# Altium PCB PCB3.PcbDoc
Units mil, origin at the board's own origin, x right, y up, seen from the top; angles counter-clockwise.
Board outline 6000 x 4000 mil, 2 copper layers (Top Layer, Bottom Layer); 23 components, 20 nets, 68 pads, 0 vias.
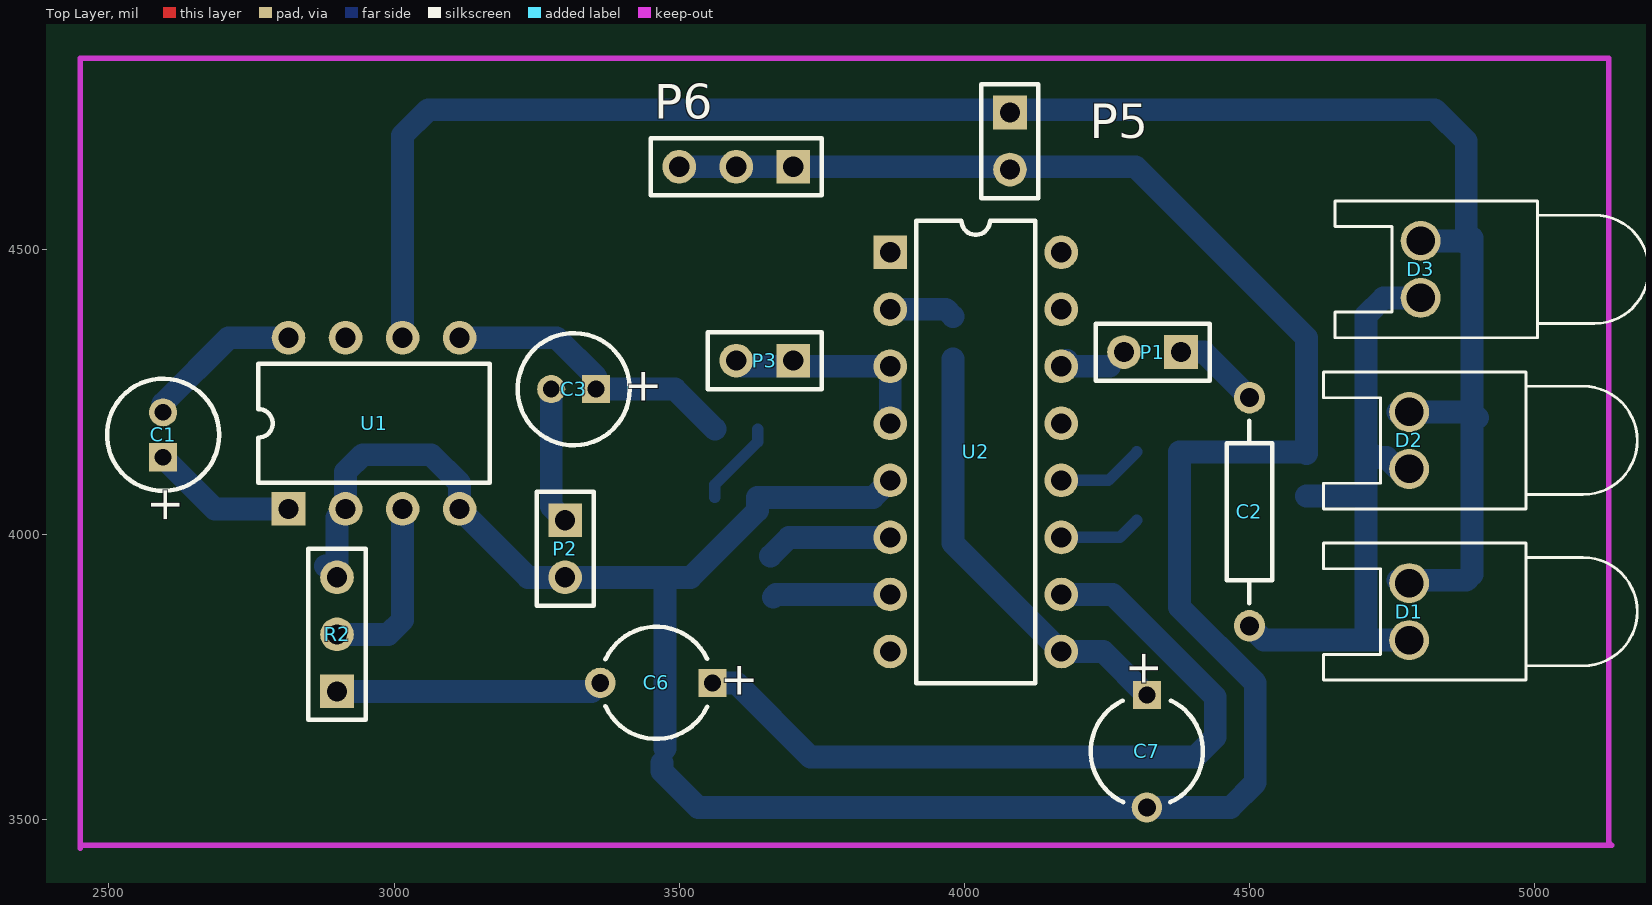
[diagram p0: Top Layer view]
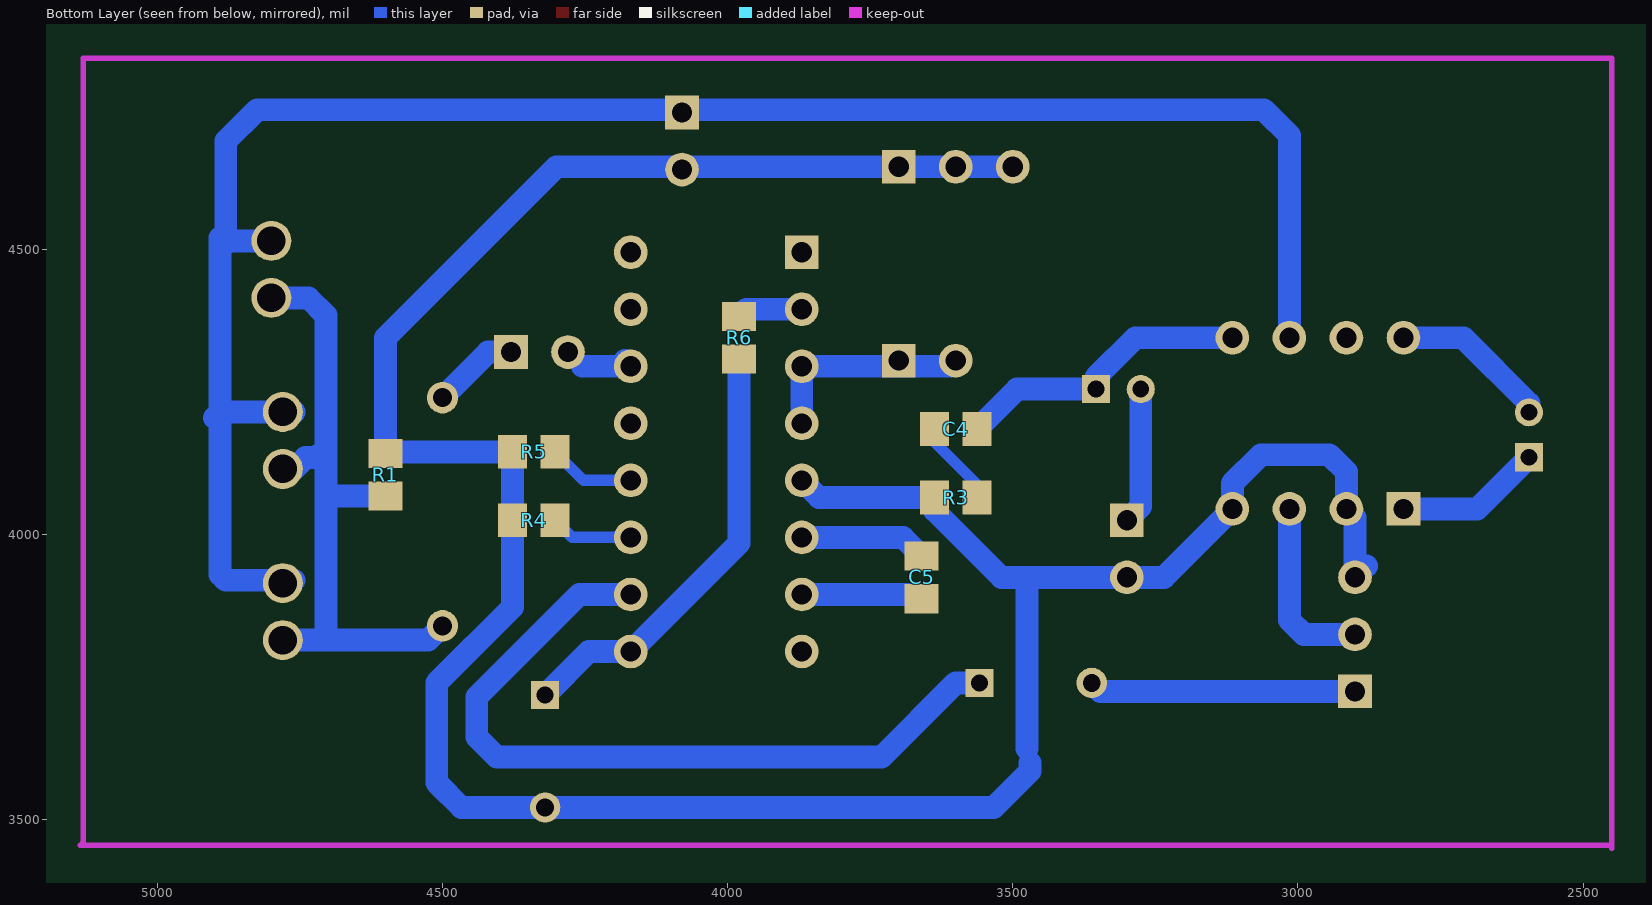
[diagram p1: Bottom Layer view, seen from below]

## Layer stack, top to bottom
Top Layer: signal copper 1.4
Dielectric: dielectric 12.6, FR-4, Dk 4.8
Bottom Layer: signal copper 1.4

## Board outline
1000,1000 7000,1000 7000,5000 1000,5000

## Design rules (kind name [scope] priority, off if disabled: settings)
Clearance [All] p1: gap=10
ComponentClearance [All] p1: gap=10 collisioncheckmode=3 verticalgap=10
PolygonConnect [All] p1: connectstyle=Relief reliefconductorwidth=10 reliefentries=4 polygonreliefangle="90 Angle"
RoutingVias [All] p1: holewidth=28 width=50 viastyle="Through Hole" minholewidth=28 minwidth=50 maxholewidth=28 maxwidth=50
SolderMaskExpansion [All] p1: expansion=4
TestPointUsage [All] p1: valid=0 allowmultiple=FALSE
Testpoint [All] p1: side=15 testpointundercomponent=TRUE minsize=40 maxsize=100 preferedsize=60 minholesize=0 maxholesize=40 preferedholesize=32 testpointgrid=1 style=1023 order=0-112345678
Width [All] p1: maxlimit=50 minlimit=10 preferedwidth=10 toplayer_maxwidth=10 minimp=50.000000 maximp=50.000000 favimp=50.000000
18 further rules are at their usual default settings.

## Components (designator, comment, footprint, x,y, rotation, side; value= is the part's Value field where it differs from the comment)
C1 "Cap Pol1" B 2595,4175 r90 top
C2 "Cap" AXIAL-0.4 4500,4040 r90 top
C3 "Cap Pol1" B 3315,4255 r180 top
C4 "Cap" 6-0805 3600,4185 r180 bottom
C5 "Cap" 6-0805 3660,3925 r90 bottom
C6 "Cap" CAPPR5-5x5 3460,3740 r180 top
C7 "Cap" CAPPR5-5x5 4320,3620 r270 top
D1 "LED0" LED-0 4780,3865 r90 top
D2 "LED0" LED-0 4780,4165 r90 top
D3 "LED0" LED-0 4800,4465 r90 top
P1 "Header 2" HDR1X2 4380,4320 r180 top
P2 "Header 2" HDR1X2 3300,4025 r270 top
P3 "Header 2" HDR1X2 3700,4305 r180 top
P5 "Header 2" HDR1X2 4080,4740 r270 top
P6 "Header 3" HDR1X3 3700,4645 r180 top
R1 "Res2" 6-0805 4600,4105 r90 bottom
R2 "" HDR1X3 2900,3725 r90 top
R3 "Res2" 6-0805 3600,4065 r0 bottom
R4 "Res2" 6-0805 4340,4025 r0 bottom
R5 "Res2" 6-0805 4340,4145 r0 bottom
R6 "Res2" 6-0805 3980,4345 r270 bottom
U1 "LM386" DIP-8 2965,4195 r0 top
U2 "CD4046" DIP-16 4020,4145 r270 top

## Footprints (in the part's own frame and the unit in brackets; to place one, negate y for a bottom-side part, rotate by r counter-clockwise, add the part's x,y. Pads: shape width x height; smd on the part's side, far side on the other; paste and mask are expansions set on the pad)
6-0805 [mm] "Chip Resistor; Body 2.0 x 1.3 mm (LxW typ)"
  rect 1.3x1.5 smd: 1(-0.95,0) 2(0.95,0)
AXIAL-0.4 [mm] "Resistor; 2 Leads"
  round 1.4 hole 0.85: 1(-5.08,0) 2(5.08,0)
  silkscreen extent -4.06,-1.02 4.06,1.02
B [mm] "Capacitor, Electrolytic, Radial; Body 5 x 6.8 mm (Dia.xH typ); Pin Spacing 2 mm (typ)"
  rect 1.25x1.25 hole 0.75: 1(-1,0)
  round 1.25 hole 0.75: 2(1,0)
  silkscreen extent -2.5,-2.5 2.5,2.5
CAPPR5-5x5 [mm] "Capacitor, Electrolytic, Radial; Body 5 x 5 mm (Dia.xH typ); Pin Spacing 5 mm (typ)"
  rect 1.25x1.25 hole 0.75: 1(-2.5,0)
  round 1.35 hole 0.8: 2(2.5,0)
  silkscreen extent -2.26,-2.5 2.27,2.5
DIP-8 [mm] "DIP; 8 Leads; Row Spacing 7.62 mm; Pitch 2.54 mm"
  rect 1.5x1.5 hole 0.9: 1(-3.81,-3.81)
  round 1.5 hole 0.9: 2(-1.27,-3.81) 3(1.27,-3.81) 4(3.81,-3.81) 5(3.81,3.81) 6(1.27,3.81) 7(-1.27,3.81) 8(-3.81,3.81)
  silkscreen extent -5.15,-2.65 5.15,2.65
DIP-16 [mm] "DIP; 16 Leads; Row Spacing 7.62 mm; Pitch 2.54 mm"
  rect 1.5x1.5 hole 0.9: 1(-8.89,-3.81)
  round 1.5 hole 0.9: 2(-6.35,-3.81) 3(-3.81,-3.81) 4(-1.27,-3.81) 5(1.27,-3.81) 6(3.81,-3.81) 7(6.35,-3.81) 8(8.89,-3.81) 9(8.89,3.81) 10(6.35,3.81) 11(3.81,3.81) 12(1.27,3.81) 13(-1.27,3.81) 14(-3.81,3.81) 15(-6.35,3.81) 16(-8.89,3.81)
  silkscreen extent -10.3,-2.65 10.3,2.65
HDR1X2 [mm] "Connector; Header; 2 Position"
  rect 1.5x1.5 hole 0.9: 1(0,0)
  round 1.5 hole 0.9: 2(2.54,0)
  silkscreen extent -1.27,-1.27 3.81,1.27
HDR1X3 [mm] "Connector; Header; 3 Position"
  rect 1.5x1.5 hole 0.9: 1(0,0)
  round 1.5 hole 0.9: 2(2.54,0) 3(5.08,0)
  silkscreen extent -1.27,-1.27 6.35,1.27
LED-0 [mil] "Typical INFRARED GaAs LED; 2 Leads"
  round 70 hole 50: 1(50,0) 2(-50,0)
  silkscreen extent -120,-400 120,150

## Part data
C1 C3: "Polarized Capacitor (Radial)"
C2 C4 C5 C6 C7: "Capacitor"
D1 D2 D3: "Typical INFRARED GaAs LED"
P1 P2 P3 P5: "Header, 2-Pin"
P6: "Header, 3-Pin"
R1 R3 R4 R5 R6: "Resistor"
R2: library part RPot, "Potentiometer"
U2: library part Component_1

## Nets (pads, with @x,y where several pads share a name; then routed paths per layer and width w, separated by ;. In a path a pad name is that pad's centre, name@x,y a point inside that pad or via, vN(x,y) a via of type N, cw(c..) or ccw(c..) an arc to the next point about the centre after c; other vN are vias at no path point)
GND: C7.2 P2.2 P5.2 P6.1 P6.2 P6.3 R1.2 R2.3 R3.2 R4.2 R5.2 U1.2 U1.4 U2.5 | length 5153.4
  Bottom Layer w20: 3715,4065 3755,4065 ; U2.5@3857.65,4082.65 U2.5
  Bottom Layer w40: R2.3@2880,3945 R2.3 2900,4030 U1.2 2915,4110 2945,4140 3065,4140 3115,4090 U1.4 3235,3925 P2.2 3415,3925 ; 3440,3925 3415,3925 ; 3470,3600 3470,3585 3533.43,3521.57 C7.2 4466.57,3521.57 4510,3565 4510,3740 4377.4,3872.6 R4.2 R5.2 4597.4,4145 R1.2 4600,4345 4300,4645 P6.1 P6.2 P6.3 ; 3475,3625 3475,3925 ; U2.5 3840,4065 3755,4065 R3.2 3637.4,4042.26 3520,3924.86 3519.86,3925 3475,3925 ; 3415,3925 3475,3925
NetC1_1: C1.1 U1.1 | length 257.5
  Bottom Layer w40: C1.1 2685.63,4045 U1.1
NetC1_2: C1.2 U1.8 | length 283.3
  Bottom Layer w40: C1.2 2595,4230 2710,4345 U1.8
NetC2_1: C2.1 D1.2 D2.2 D3.2 R1.1 | length 1157.3
  Bottom Layer w40: C2.1 4525,3815 4705,3815 ; R1.1 4702.13,4067.6 4704.53,4070 ; 4718.56,4139.04 4722.6,4135 4740,4135 D2.2@4760,4115 ; D1.2@4747.83,3815 D1.2 4705,3815 ; D3.2 4735,4415 4704.53,4384.53 4704.53,4070 ; 4704.53,4070 4704.53,3815.47 4705,3815
NetC2_2: C2.2 P1.1 | length 153.1
  Bottom Layer w40: P1.1 4420,4320 C2.2
NetC3_1: C3.1 C4.2 U1.5 | length 526
  Bottom Layer w40: U1.5 3285,4345 3354.37,4275.63 C3.1 3492.6,4255 C4.2
NetC3_2: C3.2 P2.1 | length 240.1
  Bottom Layer w40: C3.2 3275.63,4049.37 P2.1
NetC4_1: C4.1 R3.1 | length 151
  Bottom Layer w20: R3.1 3562.6,4087.6 3637.4,4162.4 C4.1
NetC5_1: C5.1 U2.7 | length 207.1
  Bottom Layer w40: C5.1@3665,3890 3670,3895 U2.7
NetC5_2: C5.2 U2.6 | length 223.5
  Bottom Layer w40: C5.2 3692.6,3995 U2.6
NetC6_1: C6.1 U2.10 | length 1364.5
  Bottom Layer w40: C6.1 3600,3740 3730,3610 4405,3610 4440,3645 4440,3715 4260,3895 U2.10
NetC6_2: C6.2 R2.1 | length 504.2
  Bottom Layer w40: R2.1 3035,3725 ; 3000,3725 3035,3725 ; 3187.6,3725 3165,3725 ; C6.2@3346.57,3725 3165,3725 ; 3035,3725 3165,3725
NetC7_1: C7.1 R6.2 U2.9 | length 773
  Bottom Layer w40: R6.2 3980,3985 U2.9 4243.43,3795 C7.1
NetP1_2: P1.2 U2.14 | length 99.1
  Bottom Layer w40: U2.14@4180,4305 U2.14 4255,4295
NetR2_2: R2.2 U1.3 | length 320.4
  Bottom Layer w40: R2.2 2990,3825 3015,3850 U1.3
NetR4_1: R4.1 U2.11 | length 145
  Bottom Layer w20: U2.11 4272.6,3995 R4.1
NetR5_1: R5.1 U2.12 | length 153.3
  Bottom Layer w20: U2.12 4252.6,4095 R5.1
NetR6_1: R6.1 U2.2 | length 115.2
  Bottom Layer w40: U2.2 3967.4,4395 R6.1
VCC: D1.1 D2.1 D3.1 P5.1 U1.6 | length 3398.8
  Bottom Layer w40: U1.6 3015,4700 3060,4745 4825,4745 4880,4690 4880,4510 4890,4520 4890,4215 ; D1.1@4760,3920 4880,3920 4890,3930 4890,4215 ; D2.1@4760,4215 D2.1 4890,4215 ; D3.1 4875,4515 ; 4900,4205 4890,4215
VCOUT: P3.1 P3.2 U2.3 U2.4 | length 374.1
  Bottom Layer w40: P3.2 3610,4295 U2.3 U2.4
pads on no net: U1.7 U2.1 U2.8 U2.13 U2.15 U2.16

## Keep-outs
Keep-Out Layer:
  lines w10: 2450,3450 2450,3665 2450,4770 2450,4835 5130,4835 5130,3665 5130,3460 5135,3455 2455,3455

## Text inside footprints (layer, text, board x,y; h text height)
C1: Top Overlay "+" at 2624.53,4018.5 h59.06 r90
C3: Top Overlay "+" at 3471.5,4284.53 h59.06 r180
C6: Top Overlay "+" at 3639.13,3769.53 h59.06 r180
C7: Top Overlay "+" at 4290.47,3799.13 h59.06 r270